# Altium PCB SpectrumAnalyzer.PcbDoc
Units mil, origin at the board's own origin, x right, y up, seen from the top; angles counter-clockwise.
Board outline 5196.85 x 2755.91 mil, 2 copper layers (Top Layer, Bottom Layer); 60 components, 37 nets, 204 pads, 0 vias.
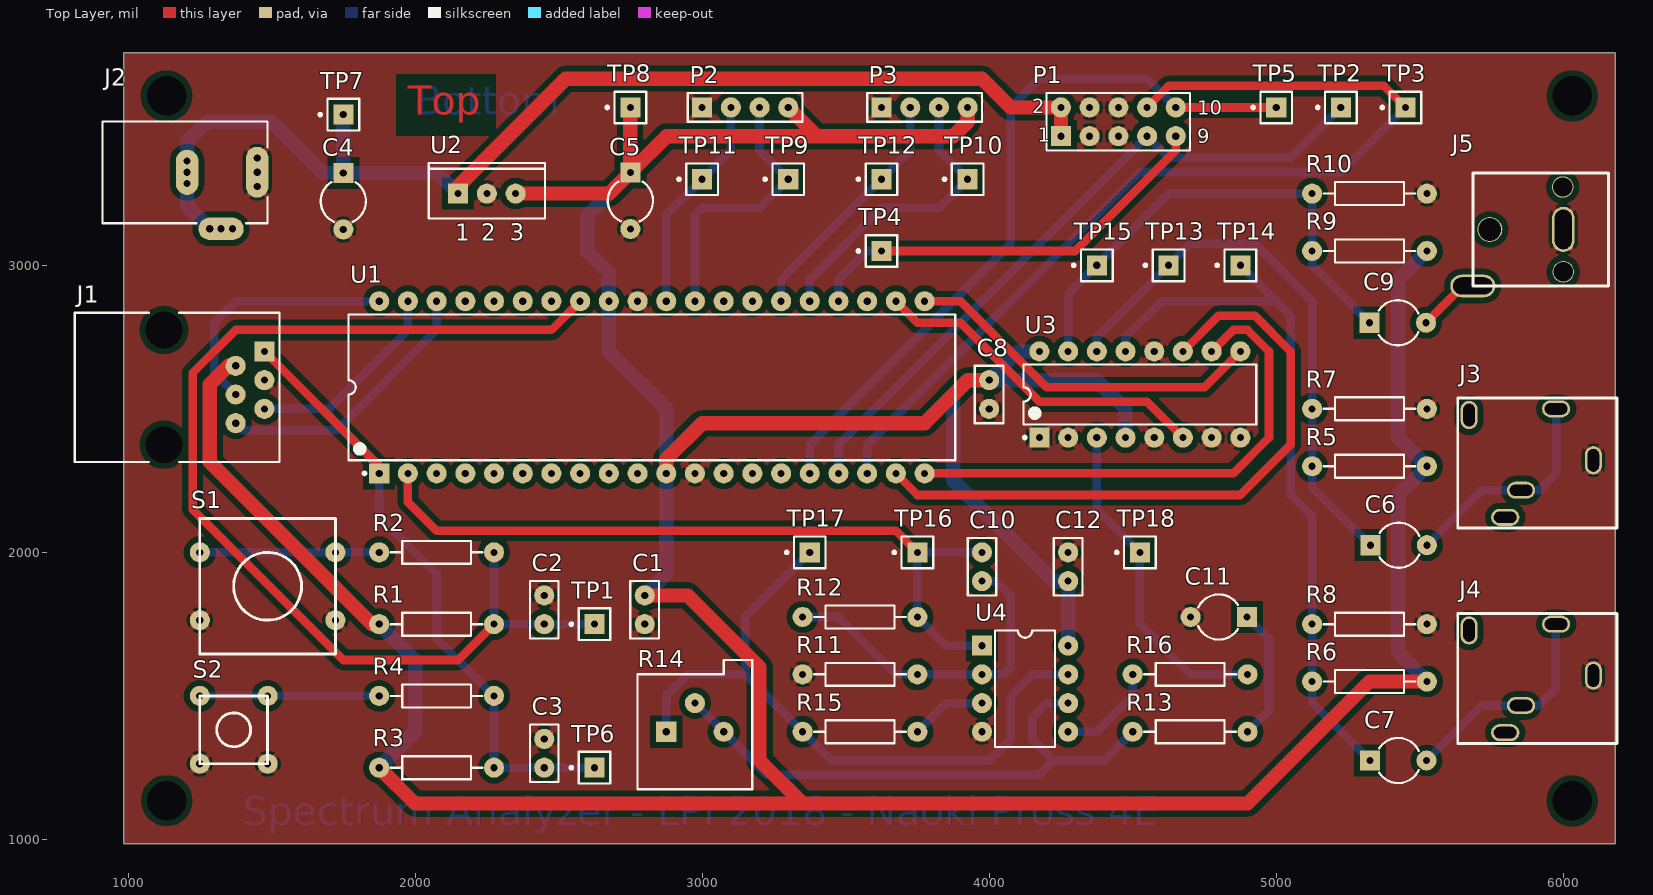
[diagram p0: Top Layer view]
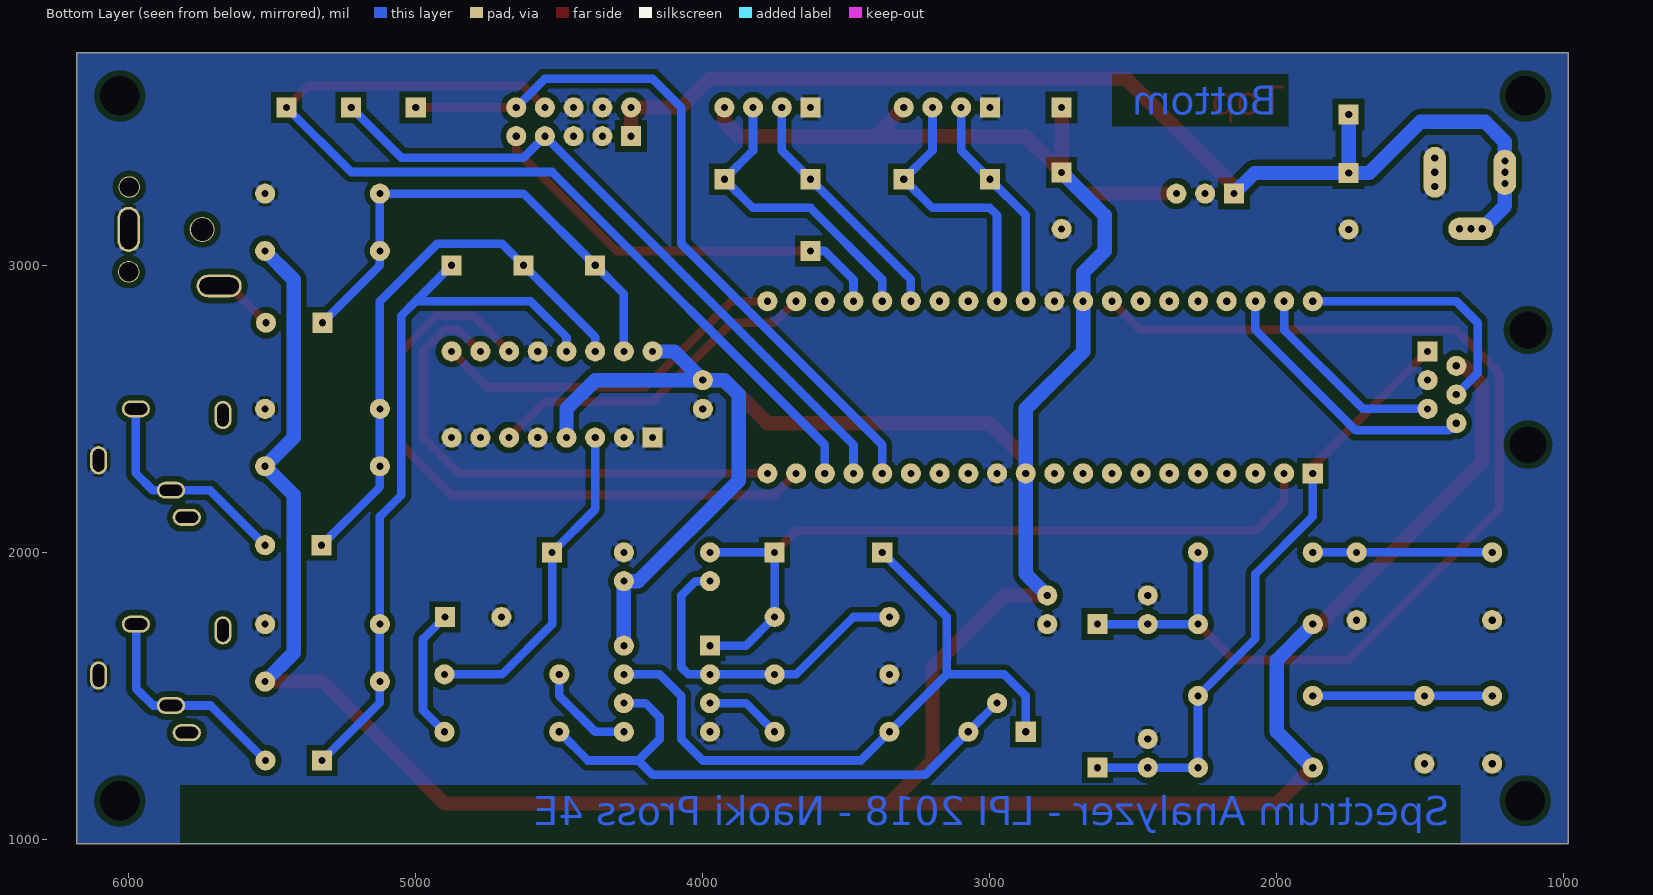
[diagram p1: Bottom Layer view, seen from below]

## Layer stack, top to bottom
Top Solder: solder mask 0.4, Solder Resist, Dk 3.5
Top Layer: signal copper 1.4
Dielectric 1: dielectric 12.6, FR-4, Dk 4.8
Bottom Layer: signal copper 1.4
Bottom Solder: solder mask 0.4, Solder Resist, Dk 3.5

## Board outline
984.25,984.25 6181.1,984.25 6181.1,3740.16 984.25,3740.16

## Design rules (kind name [scope] priority, off if disabled: settings)
Clearance [All] p1: gap=20 ignorepadtopadclearanceinfootprint=FALSE
HoleSize [All] p1: absolutevalues=TRUE maxlimit=400 minlimit=1 maxpercent=80.000 minpercent=20.000
MinimumSolderMaskSliver [All] p1: minsoldermaskwidth=5
PolygonConnect [All] p1: connectstyle=Relief reliefconductorwidth=20 reliefentries=4 polygonreliefangle="45 Angle" airgapwidth=10
RoutingVias [All] p1: holewidth=28 width=50 viastyle="Through Hole" minholewidth=28 minwidth=50 maxholewidth=28 maxwidth=50
SilkToSilkClearance [All] p1: silktosilkclearance=5
SilkToSolderMaskClearance [IsPad] p1: minsilkscreentomaskgap=0 clearancetoexposedcopper=TRUE
SolderMaskExpansion [All] p1: expansion=4
Width [All] p1: maxlimit=60 minlimit=20 preferedwidth=30
26 further rules are at their usual default settings.

## Classes and differential pairs
component class SignalAdapter: C6 C7 C8 C9 C10 C11 C12 J3 J4 J5 R5 R6 R7 R8 R9 R10 R11 R12 R13 R14 R15 R16 TP13 TP14 TP15 TP16 TP17 TP18 U3 U4
component class SignalProcessing: C1 C2 C3 C4 C5 J1 J2 P1 P2 P3 R1 R2 R3 R4 S1 S2 TP1 TP2 TP3 TP4 TP5 TP6 TP7 TP8 TP9 TP10 TP11 TP12 U1 U2

## Components (designator, comment, footprint, x,y, rotation, side; value= is the part's Value field where it differs from the comment)
C1 "Cap" RAD-0.1 2800,1800 r270 top value=100nF
C2 "Cap" RAD-0.1 2450,1800 r270 top value=100nF
C3 "Cap" RAD-0.1 2450,1300 r270 top value=100nF
C4 "Cap2" CAPR5-4X5 1750,3223.43 r270 top value=330nF
C5 "Cap2" CAPR5-4X5 2750,3225 r270 top value=1uF
C6 "Cap2" CAPR5-4X5 5426.57,2025 r0 top value=1uF
C7 "Cap2" CAPR5-4X5 5425,1275 r0 top value=1uF
C8 "Cap" RAD-0.1 4000,2550 r270 top value=100nF
C9 "Cap2" CAPR5-4X5 5423.43,2800 r0 top value=1uF
C10 "Cap" RAD-0.1 3975,1950 r90 top value=1nF
C11 "Cap2" CAPR5-4X5 4800,1775 r180 top value=1uF
C12 "Cap" RAD-0.1 4275,1950 r90 top value=100nF
J1 "LVPICSP" 95001-2661 814.76,2575 r270 top
J2 "PWR2.5" KLD-0202 910.63,3324.21 r0 top
J3 "1503 3.5mm Jack" "JIS C 6560" 6187.6,2320.87 r270 top
J4 "1503 3.5mm Jack" "JIS C 6560" 6187.6,1570.87 r270 top
J5 "RCA" RC-5231 6000,3125 r270 top
P1 "Header 5X2" HDR2X5 4250,3450 r0 top
P2 "Header 4" HDR1X4 3000,3550 r0 top
P3 "Header 4" HDR1X4 3625,3550 r0 top
R1 "Res2" AXIAL-0.4 2075,1750 r180 top value=10K
R2 "Res2" AXIAL-0.4 2075,2000 r0 top value=1K
R3 "Res2" AXIAL-0.4 2075,1250 r180 top value=10K
R4 "Res2" AXIAL-0.4 2075,1500 r0 top value=1K
R5 "Res2" AXIAL-0.4 5325,2300 r0 top value=20K
R6 "Res2" AXIAL-0.4 5325,1550 r0 top value=20K
R7 "Res2" AXIAL-0.4 5325,2500 r180 top value=20K
R8 "Res2" AXIAL-0.4 5325,1750 r180 top value=20K
R9 "Res2" AXIAL-0.4 5325,3050 r0 top value=20K
R10 "Res2" AXIAL-0.4 5325,3250 r180 top value=20K
R11 "Res2" AXIAL-0.4 3550,1575 r0 top value=15K
R12 "Res2" AXIAL-0.4 3550,1775 r0 top value=15K
R13 "Res2" AXIAL-0.4 4700,1375 r180 top value=2K
R14 "RPot" VR4 2975,1425 r0 top value=10K
R15 "Res2" AXIAL-0.4 3550,1375 r180 top value=7.5K
R16 "Res2" AXIAL-0.4 4700,1575 r0 top value=1.6K
S1 "SW-PB" PUSHBTN_12x12mm 1486.22,1881.89 r180 top
S2 "SW-PB" PUSHBTN_6x6mm 1368.11,1381.89 r180 top
TP1 "Test Pad" PIN1 2625,1750 r90 top
TP2 "Test Pad" PIN1 5225,3550 r90 top
TP3 "Test Pad" PIN1 5450,3550 r90 top
TP4 "Test Pad" PIN1 3625,3050 r90 top
TP5 "Test Pad" PIN1 5000,3550 r90 top
TP6 "Test Pad" PIN1 2625,1250 r90 top
TP7 "Test Pad" PIN1 1750,3525 r90 top
TP8 "Test Pad" PIN1 2750,3550 r90 top
TP9 "Test Pad" PIN1 3300,3300 r90 top
TP10 "Test Pad" PIN1 3925,3300 r90 top
TP11 "Test Pad" PIN1 3000,3300 r90 top
TP12 "Test Pad" PIN1 3625,3300 r90 top
TP13 "Test Pad" PIN1 4625,3000 r90 top
TP14 "Test Pad" PIN1 4875,3000 r90 top
TP15 "Test Pad" PIN1 4375,3000 r90 top
TP16 "Test Pad" PIN1 3750,2000 r90 top
TP17 "Test Pad" PIN1 3375,2000 r90 top
TP18 "Test Pad" PIN1 4525,2000 r90 top
U1 "PIC18F45K20-I/P" PDIP600-P40 2825,2575 r90 top
U2 "MC7805ACT" 221A-04 2250,3250 r0 top
U3 "CD4051BCN" N16E 4525,2550 r90 top
U4 "AD826AN" N-8 4125,1525 r270 top

## Footprints (in the part's own frame and the unit in brackets; to place one, negate y for a bottom-side part, rotate by r counter-clockwise, add the part's x,y. Pads: shape width x height; smd on the part's side, far side on the other; paste and mask are expansions set on the pad)
221A-04 [mil] "TO, Thru-Hole, Vertical, Heatsink Mounted; 3 In-Line Leads; Pitch 2.54 mm"
  rect 70x70 hole 25: 1(-100,0)
  round 70 hole 25: 2(0,0) 3(100,0)
  silkscreen extent -203,-87 203,106
95001-2661 [mm] "Connector; PCB Jack, Thru-Hole; 1-Port, 6 Positions, 6 Loaded; Unshielded without Lightpipes; Right Angle"
  rect 1.778x1.778 hole 0.635: 1(-3.175,16.77)
  round 1.778 hole 0.635: 2(-1.905,14.23) 3(-0.635,16.77) 4(0.635,14.23) 5(1.905,16.77) 6(3.175,14.23)
  round 2.95 hole 3.25 unplated mask+0.102: MH1(-5.08,7.88) MH2(5.08,7.88)
  silkscreen extent -6.6,0 6.6,18.1
AXIAL-0.4 [mil] "Axial Device, Thru-Hole; 2 Leads; 0.4 in Pin Spacing"
  round 70 hole 25: 1(-200,0) 2(200,0)
  silkscreen extent -160,-40 160,40
CAPR5-4X5 [mil] "Capacitor; 2 Leads"
  rect 70x70 hole 25: 1(-98.43,0)
  round 70 hole 25: 2(98.43,0)
  silkscreen extent -66,-79 72,79
HDR1X4 [mil] "Connector; Header; 4 Position"
  rect 70x70 hole 25: 1(0,0)
  round 70 hole 25: 2(100,0) 3(200,0) 4(300,0)
  silkscreen extent -50,-50 350,50
HDR2X5 [mil] "Connector; Header; 5x2 Position"
  rect 70x70 hole 25: 1(0,0)
  round 70 hole 25: 2(0,100) 3(100,0) 4(100,100) 5(200,0) 6(200,100) 7(300,0) 8(300,100) 9(400,0) 10(400,100)
  silkscreen extent -50,-50 450,150
"JIS C 6560" [mm] "1503 09/17 Jack"
  oval 2.5x1.5 hole 1 slot 2 at 0 deg: 1(0,-2.1) 4(-4,-13.1)
  oval 1.5x2.5 hole 1 slot 2 at 90 deg: 2(-4.55,-5.4) 3(5.05,-9.9) 5(2.65,-8.5)
  silkscreen extent -5.5,-14.1 6,0
KLD-0202 [mm] "DC Power Jack, 2.5mm, KLD Series, PCB Mount"
  oval 2x4.5 hole 0.635: 1(13.7,0)
  round 1.778 hole 0.635: 1A(13.7,-1.25) 1B(13.7,1.25) 2A(7.5,-1) 2B(7.5,1) 3A(9.5,-5) 3B(11.5,-5)
  oval 2x4 hole 0.635: 2(7.5,0)
  oval 4x2 hole 0.635: 3(10.5,-5)
  silkscreen extent 0,-4.5 14.6,4.5
N16E [mil] "DIP, 16-Leads, Row Spacing 7.62mm, Pitch 2.54mm, Body 19.3x6.35mm"
  rect 70x70 hole 25: 1(-150,350)
  round 70 hole 25: 2(-150,250) 3(-150,150) 4(-150,50) 5(-150,-50) 6(-150,-150) 7(-150,-250) 8(-150,-350) 9(150,-350) 10(150,-250) 11(150,-150) 12(150,-50) 13(150,50) 14(150,150) 15(150,250) 16(150,350)
  silkscreen extent -155,-406 104,406, body extent -142,-405 142,405, height 200
N-8 [mil] "DIP; 8 Leads; Row Spacing 7.62 mm; Pitch 2.54 mm"
  rect 70x70 hole 25: 1(-150,-150)
  round 70 hole 25: 2(-50,-150) 3(50,-150) 4(150,-150) 5(150,150) 6(50,150) 7(-50,150) 8(-150,150)
  silkscreen extent -203,-104 203,104
PDIP600-P40 [mil] "DIP, 40-Leads, Row Spacing 15.24mm, Pitch 2.54mm, Body 51.8x13.5mm"
  rect 70x70 hole 25: 1(-300,950)
  round 70 hole 25: 2(-300,850) 3(-300,750) 4(-300,650) 5(-300,550) 6(-300,450) 7(-300,350) 8(-300,250) 9(-300,150) 10(-300,50) 11(-300,-50) 12(-300,-150) 13(-300,-250) 14(-300,-350) 15(-300,-450) 16(-300,-550) 17(-300,-650) 18(-300,-750) 19(-300,-850) 20(-300,-950) 21(300,-950) 22(300,-850) 23(300,-750) 24(300,-650) 25(300,-550) 26(300,-450) 27(300,-350) 28(300,-250) 29(300,-150) 30(300,-50) 31(300,50) 32(300,150) 33(300,250) 34(300,350) 35(300,450) 36(300,550) 37(300,650) 38(300,750) 39(300,850) 40(300,950)
  silkscreen extent -305,-1057 254,1057, body extent -287,-1057 287,1057, height 250
PIN1 [mil] "Generic Antenna; 1 Lead"
  rect 70x70 hole 25: 1(0,0)
  silkscreen extent -55,-55 55,86
PUSHBTN_6x6mm [mil] "6x6mm Square Push Button"
  round 70 hole 25: 1(-118.11,118.11) 1(118.11,118.11) 2(-118.11,-118.11) 2(118.11,-118.11)
  silkscreen extent -118,-118 118,118
PUSHBTN_12x12mm [mil] "12x12mm Square push button"
  round 70 hole 25: 1(-236.22,118.11) 1(236.22,118.11) 2(-236.22,-118.11) 2(236.22,-118.11)
  silkscreen extent -236,-236 236,236
RAD-0.1 [mil] "Radial Cap, Thru-Hole; 2 Leads; 0.1 in Pin Spacing"
  round 70 hole 25: 1(-50,0) 2(50,0)
  silkscreen extent -100,-50 100,50
RC-5231 [mm] "JEITA RC-5231 RCA connector"
  round 1.9 hole 1.7 mask+0.102: 0(-3.75,-0.05) 0(3.75,0)
  round 2.2 hole 2 mask+0.102: 0(0,-6.5)
  oval 4x2 hole 1.5 slot 3.5 at 0 deg: 1(0,0)
  oval 2x4 hole 1.5 slot 3.5 at 90 deg: 4(5,-8)
  silkscreen extent -5,-8 5,4
VR4 [mil] "Thru-Hole; 3 Leads"
  rect 70x70 hole 25: 1(-100,-50)
  round 70 hole 25: 2(0,50) 3(100,-50)
  silkscreen extent -200,-250 200,200

## Part data
C1 C2 C3 C4 C5 C6 C7 C8 C9 C10 C11 C12: "Capacitor", Publisher="Altium Limited"
  C1 C2 C3 C8 C10 C12: LatestRevisionDate=17-Jul-2002, LatestRevisionNote="Re-released for DXP Platform.", PackageDescription="Radial Cap, Thru-Hole; 2 Leads; 0.3 in Pin Spacing", PackageReference=RAD-0.3, Published=8-Jun-2000
  C4 C5 C6 C7 C9 C11: PackageDescription="Capacitor; 2 Leads", PackageReference=CAPR5-4X5, Published=23-Sep-2002
J1: library part 95001-2661, "Right Angle, Low Profile, Flangeless PCB Jack", PackageDocument=17-Dec-2001, ComponentLink1Description="Manufacturer Link", ComponentLink1URL=http://www.molex.com/, ComponentLink2Description=Datasheet, ComponentLink2URL=http://www.molex.com/cmc_upload/common_files/1222003_mx95001b.pdf, ComponentLink3Description="Iges Model", ComponentLink3URL=http://www.molex.com/pdm_docs/igs/95001-2441_igs.zip, DatasheetDocument=17-Dec-2001, DrillSize="Nominal, Rounded to nearest 0.05mm", PackageReference=95001-2661, PCB_Layout="Complies with Manufacturer's Recommendation.", PCB_Mounting=Thru-Hole, PerformanceCategory=3, Ports=1, Positions/Loaded="Port1 - 6/6", Published=25-Jun-2002, Publisher="Altium Limited"
J2: "Low Voltage Power Supply Connector", ComponentLink1Description="Manufacturer Link", ComponentLink1URL=http://domino.kycon.com/internet/Products.html, DatasheetDocument=09-May-2002, Published=17-Dec-2003, Publisher="Altium Limited"
J3 J4: library part 1503, "1503 09/17 Jack connector"
J5: "RCA Phono Jack, Right Angle, Thru-Hole, Snap-In", PackageDocument=7-Jul-2000, ComponentLink1Description="Manufacturer Link", ComponentLink1URL=http://www.mouser.com/kobiconn/, DatasheetDocument=7-Jul-2000, DrillAndSlotSize="Corresponds to nominal value.", LatestRevisionDate=15-Jul-2004, LatestRevisionNote="Component Replaced.", PackageReference=161, PCB_Layout="Complies with manufacturer's recommendation.", Published=15-Jul-2004, Publisher="Altium Limited"
P1: "Header, 5-Pin, Dual row", LatestRevisionDate=17-Jul-2002, LatestRevisionNote="Re-released for DXP Platform.", Publisher="Altium Limited"
P2 P3: "Header, 4-Pin", LatestRevisionDate=17-Jul-2002, LatestRevisionNote="Re-released for DXP Platform.", Publisher="Altium Limited"
R1 R2 R3 R4 R5 R6 R7 R8 R9 R10 R11 R12 R13 R15 R16: "Resistor", LatestRevisionDate=17-Jul-2002, LatestRevisionNote="Re-released for DXP Platform.", PackageDescription="Axial Device, Thru-Hole; 2 Leads; 0.4 in Pin Spacing", PackageReference=AXIAL-0.4, Published=8-Jun-2000, Publisher="Altium Limited"
R14: "Potentiometer", LatestRevisionDate=17-Jul-2002, LatestRevisionNote="Re-released for DXP Platform.", PackageDescription="Variable Resistor, Thru-Hole; 3 Leads", PackageReference=VR5, Published=8-Jun-2000, Publisher="Altium Limited", Set Position=0.5, Sim Note="Enter the Resistance value and the set point into parameter fields."
S1 S2: "Switch", LatestRevisionDate=17-Jul-2002, LatestRevisionNote="Re-released for DXP Platform.", PackageDescription="Switch; 2 Leads", PackageReference=SPST-2, Published=24-Mar-1999, Publisher="Altium Limited"
TP1 TP2 TP3 TP4 TP5 TP6 TP7 TP8 TP9 TP10 TP11 TP12 TP13 TP14 TP15 TP16 TP17 TP18: library part TestPad
U1: "Flash Microcontroller with 10-Bit A/D and nanoWatt Technology, 32K Flash, 40-Pin PDIP, Industrial Temperature Range", Supplier Part Number 1=PIC18F45K20-I/P-ND, ComponentLink1Description=Datasheet, ComponentLink1URL=http://ww1.microchip.com/downloads/en/DeviceDoc/41303F.pdf, ComponentLink2Description="Packaging Specification", ComponentLink2URL=http://www.microchip.com/stellent/groups/techpub_sg/documents/packagingspec/en012702.pdf, ComponentLink3Description="Microchip.com Home", ComponentLink3URL=http://www.microchip.com/, DatasheetVersion="revF, Sep-2009", LatestRevisionDate=02-Dec-2009, LatestRevisionNote="Updated to datasheet revision F, Sep-2009", PackageDescription="40-Lead Plastic Dual In-Line (P) - 600 mil Body [PDIP]", PackageReference=PDIP600-P40, PackageVersion="revBB, Aug-2009", Published=29-Jan-2009, Publisher="Altium Limited", Supplier 1=Digi-Key, Supplier 2=Farnell, Supplier Part Number 2=1439588
U2: "3-Terminal Positive Fixed Voltage Regulator", Code_JEDEC=TO-262-AA, ComponentLink1Description="Manufacturer Link", ComponentLink1URL=http://www.onsemi.com/site/products/taxonomy/0,4438,503,00.html, ComponentLink2Description=Datasheet, ComponentLink2URL=http://www.onsemi.com/pub/Collateral/MC7800-D.PDF, DatasheetVersion=1988, Note="Pin 2 is electrically connected to TAB", PackageDescription="TO, Thru-Hole, Vertical, Heatsink Mounted; 3 In-Line Leads; Pitch 2.54 mm", PackageReference=221A-04, Published=17-Jul-2002, Publisher="Altium Limited"
U3: "8-Channel Analog Multiplexer/Demultiplexer", ComponentLink1Description="Manufacturer Link", ComponentLink1URL=http://www.fairchildsemi.com/, ComponentLink2Description=Datasheet, ComponentLink2URL=http://www.fairchildsemi.com/ds/CD%2FCD4052BC.pdf, DatasheetVersion=Jan-1999, LatestRevisionDate=29-May-2009, LatestRevisionNote="Component Body Added.", PackageDescription="DIP, 16-Pin, Row Spacing 7.62 mm, Pitch 2.54 mm", PackageReference=N16E, PackageVersion=2000, Published=17-Jul-2002, Publisher="Altium Limited"
U4: "High-Speed, Low-Power Dual Operational Amplifier", ComponentLink1Description="Manufacturer Link", ComponentLink1URL=http://www.analog.com/en/prod/0,,759_786_AD826%2C00.html, ComponentLink2Description=Datasheet, ComponentLink2URL=http://www.analog.com/UploadedFiles/Data_Sheets/432952987AD826_b.pdf, DatasheetVersion="REV. A 1995", LatestRevisionDate=04-Mar-2005, LatestRevisionNote="Stylized 3D Model Added.", PackageDescription="DIP; 8 Leads; Row Spacing 7.62 mm; Pitch 2.54 mm", PackageReference=N-8, PackageVersion=revA, Published=8-Jun-2000, Publisher="Altium Limited"

## Free pads (board coordinates)
  round 60 hole 137.8 mask+4: 0(1134.25,3590.16) 0(1135,1135) 0(6031.1,1134.25) 0(6031.1,3590.16)

## Nets (pads, with @x,y where several pads share a name; then routed paths per layer and width w, separated by ;. In a path a pad name is that pad's centre, name@x,y a point inside that pad or via, vN(x,y) a via of type N, cw(c..) or ccw(c..) an arc to the next point about the centre after c; other vN are vias at no path point)
5V: C1.1 C5.1 C8.1 C12.1 J1.2 P2.4 P3.4 R1.2 R3.2 R5.2 R6.2 R9.2 TP8.1 U1.11 U1.32 U2.3 U3.4 U3.16 U4.8 | length 15514.1
  Top Layer w30: 2673.43,3250 2676.57,3250
  Top Layer w50: J1.2 1350,2650 1285,2585 1285,2315 1850,1750 R1.2 ; R3.2 2000,1125 3350,1125 ; U2.3 2673.43,3250 ; 2676.57,3250 C5.1 ; TP8.1 C5.1 ; C1.1 2950,1850 3200,1600 3200,1275 3350,1125 ; U1.11 2875,2325 3000,2450 3775,2450 3925,2600 C8.1 ; P2.4 3400,3450 ; P3.4 3925,3500 3875,3450 3400,3450 ; R6.2 5325,1550 4900,1125 3350,1125 ; C5.1 2876.57,3450 3400,3450
  Bottom Layer w30: 2600,3175 2601.57,3175
  Bottom Layer w50: R3.2 2000,1375 2000,1625 R1.2 ; 2600,3175 2600,3050 2675,2975 U1.32 2675,2700 2875,2500 U1.11 2875,1925 C1.1 ; 2601.57,3175 C5.1 ; U3.16 4100,2700 C8.1 ; U4.8 C12.1 4225,1900 3875,2250 3875,2550 3925,2600 C8.1 ; U3.4 4475,2500 4375,2600 C8.1 ; R6.2 5425,1650 5425,2200 R5.2 5425,2400 5425,2950 R9.2
12V: C4.1 J2.2 J2.2A J2.2B J2.3 J2.3A J2.3B P1.1 P1.2 TP7.1 U2.1 | length 3976.1
  Top Layer w50: U2.1 2150,3275 2525,3650 3975,3650 4075,3550 P1.2 P1.1
  Bottom Layer w50: J2.2A 1205.91,3206.1 J2.3A ; J2.2 J2.2B 1205.91,3430.91 1275,3500 1500,3500 1678.15,3321.85 C4.1@1728.15,3321.85 ; TP7.1 C4.1 2078.15,3321.85 U2.1
AUDIO-IN: C6.1 R5.1 R7.2 TP13.1 U3.14 | length 1951.6
  Bottom Layer w30: U3.14 4375,2750 TP13.1 4700,3075 4925,3075 5125,2875 R7.2 R5.1 5125,2228.15 C6.1
C\S\: P1.7 TP2.1 U1.17 | length 2398.8
  Bottom Layer w30: U1.17 3475,2375 P1.7 4625,3375 5050,3375 TP2.1
FILTER-OUT: C10.2 R12.2 TP16.1 U1.2 U4.1 | length 2663.9
  Top Layer w30: U1.2 1975,2175 2075,2075 3675,2075 TP16.1
  Bottom Layer w30: U4.1 3850,1675 R12.2 TP16.1 C10.2
GND: C1.2 C2.1 C3.1 C4.2 C5.2 C8.2 C11.2 C12.2 J1.3 J2.1 J2.1A J2.1B J3.1 J4.1 J5.1 P1.3 P1.4 P1.5 P1.6 P2.1 P3.1 R7.1 R8.1 R10.1 R11.1 S1.1 S2.1 U1.12 U1.31 U2.2 U3.1 U3.2 U3.5 U3.7 U3.8 U3.12 U4.4
MIC-IN: C7.1 R6.1 R8.2 TP14.1 U3.13 | length 2538.8
  Bottom Layer w30: U3.13 4475,2750 4600,2875 5000,2875 ; TP14.1 5000,2875 ; C7.1 5125,1476.58 R6.1 R8.2 5125,2125 5050,2200 5050,2825 5000,2875
MUX-A: U1.19 U3.11 | length 2282.1
  Top Layer w30: U1.19 3750,2200 4875,2200 5050,2375 5050,2700 4925,2825 4800,2825 U3.11
MUX-B: U1.20 U3.10 | length 1813.9
  Top Layer w30: U1.20 4850,2275 4975,2400 4975,2700 4900,2775 4850,2775 U3.10
MUX-C: U1.21 U3.9 | length 1276
  Top Layer w30: U1.21 3900,2875 4200,2575 4750,2575 U3.9
MUX-E\N\: U1.22 U3.6 | length 1196.8
  Top Layer w30: U1.22 3750,2800 3900,2800 4175,2525 4550,2525 U3.6
NetC6_2: C6.2 J3.2 J3.5 | length 778.6
  Bottom Layer w30: C6.2 5716.54,2216.54 J3.5 5916.54,2216.54 5975,2275 J3.2
NetC7_2: C7.2 J4.2 J4.5 | length 778.6
  Bottom Layer w30: C7.2 5714.96,1466.54 5914.96,1466.54 5973.43,1525 J4.2@5973.43,1750
NetC9_2: C9.2 J5.4 | length 216.3
  Top Layer w30: C9.2 5650,2928.15 J5.4
NetC10_1: C10.1 R11.2 R12.1 U4.2 | length 1188.9
  Bottom Layer w30: R12.1 3475,1775 3675,1575 R11.2 U4.2 4050,1575 4075,1600 4075,1850 4025,1900 C10.1
NetC11_1: C11.1 R13.1 | length 462.8
  Bottom Layer w30: C11.1 4975,1698.42 4975,1450 R13.1
NetJ1_4: J1.4 U1.40 | length 887.1
  Bottom Layer w30: J1.4 1300,2625 1300,2800 1375,2875 U1.40
NetJ1_5: J1.5 U1.39 | length 713.9
  Bottom Layer w30: J1.5 1700,2500 1975,2775 U1.39
NetJ1_6: J1.6 U1.38 | length 955.3
  Bottom Layer w30: J1.6 1400,2425 1725,2425 2075,2775 U1.38
NetR2_1: R2.1 S1.2 | length 625
  Bottom Layer w30: S1.2@1250,2000 1722.44,2000 R2.1
NetR4_1: R4.1 S2.2 | length 625
  Bottom Layer w30: S2.2@1250,1500 1486.22,1500 R4.1
NetR13_2: R13.2 R14.2 R14.3 U4.6 | length 2017.5
  Bottom Layer w30: R14.2 R14.3 3225,1225 4175,1225 4225,1275 ; U4.6 4200,1475 4150,1425 4150,1350 4225,1275 ; R13.2 4400,1275 4225,1275
NetR15_1: R15.1 U4.3 | length 266.4
  Bottom Layer w30: R15.1 3850,1475 U4.3
NetR16_1: R16.1 U4.5 | length 351.8
  Bottom Layer w30: U4.5 4375,1375 4500,1500 R16.1
OPAMP-IN: R16.2 TP18.1 U3.3 | length 1159.6
  Bottom Layer w30: U3.3 4375,2150 TP18.1 4525,1750 4700,1575 R16.2
OPAMP-OUT: R14.1 R15.2 TP17.1 U4.7 | length 2410.7
  Bottom Layer w30: R14.1 2875,1500 2950,1575 3150,1575 ; TP17.1 3150,1775 3150,1575 ; U4.7 4150,1575 4075,1500 4075,1350 4000,1275 3450,1275 R15.2 3150,1575
PUSHBTN: C2.2 R1.1 R2.2 TP1.1 U1.33 | length 3847.8
  Top Layer w30: R1.1 2150,1625 1750,1625 1225,2150 1225,2625 1375,2775 2475,2775 U1.33
  Bottom Layer w30: R2.2 R1.1 C2.2 TP1.1
R\S\T\: C3.2 J1.1 R3.1 R4.2 TP6.1 U1.1 | length 2131.4
  Top Layer w30: J1.1 1875,2300 U1.1
  Bottom Layer w30: U1.1 1875,2125 2075,1925 2075,1700 R4.2 R3.1 C3.2 TP6.1
RCA-IN: C9.1 R9.1 R10.2 TP15.1 U3.15 | length 1727.8
  Bottom Layer w30: U3.15 4275,2900 TP15.1 4625,3250 R10.2 R9.1 5125,3000 C9.1
RX1: P3.2 TP12.1 U1.26 | length 861.4
  Bottom Layer w30: U1.26 3275,2950 TP12.1 3725,3400 P3.2
RX2: P2.2 TP11.1 U1.30 | length 768.2
  Bottom Layer w30: U1.30 2875,3175 TP11.1 3100,3400 P2.2
SCK: P1.8 TP3.1 U1.18 | length 3423.8
  Top Layer w30: P1.8 4625,3625 5375,3625 TP3.1
  Bottom Layer w30: U1.18 3575,2375 4525,3325 5225,3325 TP3.1
SDI: U1.23
SDO: P1.9 TP4.1 U1.24 | length 1486.4
  Top Layer w30: TP4.1 4300,3050 4650,3400 P1.9
  Bottom Layer w30: U1.24 3475,2950 3575,3050 TP4.1
TX1: P3.3 TP10.1 U1.25 | length 1061.4
  Bottom Layer w30: U1.25 3375,2950 3625,3200 3825,3200 TP10.1 3825,3400 P3.3
TX2: P2.3 TP9.1 U1.29 | length 968.2
  Bottom Layer w30: U1.29 2975,3175 3000,3200 3200,3200 TP9.1 3200,3400 P2.3
WR: P1.10 TP5.1 U1.16 | length 2572.8
  Top Layer w30: P1.10 TP5.1
  Bottom Layer w30: U1.16 3375,2375 4075,3075 4075,3550 4175,3650 4550,3650 P1.10
pads on no net: J1.MH1 J1.MH2 J3.3 J3.4 J4.3 J4.4 J5.0 U1.3 U1.4 U1.5 U1.6 U1.7 U1.8 U1.9 U1.10 U1.13 U1.14 U1.15 U1.27 U1.28 U1.34 U1.35 U1.36 U1.37

## Polygon pours and split planes (outlines as drawn)
GND on Top Layer "GND" (solid, remove dead copper, pour order 2): 984.25,984.25 984.25,3740.16 6181.1,3740.16 6181.1,984.25
GND on Bottom Layer "GND" (solid, remove dead copper, pour order 0): 984.25,984.25 984.25,3740.16 6181.1,3740.16 6181.1,984.25

## Other copper
Top Layer:
  text "Top" at 1975,3525 h100
Bottom Layer:
  text "Bottom" at 2000,3525 h100
  text "Spectrum Analyzer - LPI 2018 - Naoki Pross 4E" at 1400,1050 h100

## Dimensions
984.25,984.25 to 6181.1,984.25 on Mechanical 2
984.25,984.25 to 984.25,3740.16 on Mechanical 2

## Text inside footprints (layer, text, board x,y; h text height)
P1: Top Overlay "10" at 4725,3525 h50; Top Overlay "9" at 4725,3425 h50; Top Overlay "1" at 4170,3430 h50; Top Overlay "2" at 4150,3530 h50
U2: Top Overlay "1" at 2140.16,3085.63 h59.06; Top Overlay "2" at 2230.32,3085.63 h59.06; Top Overlay "3" at 2330.32,3085.63 h59.06